# Altium PCB demo_dermis_main_testboard.PcbDoc (part 4 of 7)
Units mm, origin at the board's own origin, x right, y up, seen from the top; angles counter-clockwise.
Board outline 348.67 x 252.79 mm, 4 copper layers (Top Layer, Layer 1, Layer 2, Bottom Layer), stack 0.603 mm thick; 389 components, 231 nets, 2086 pads, 2626 vias.
Unrouted connection lines stored in the file: 34.
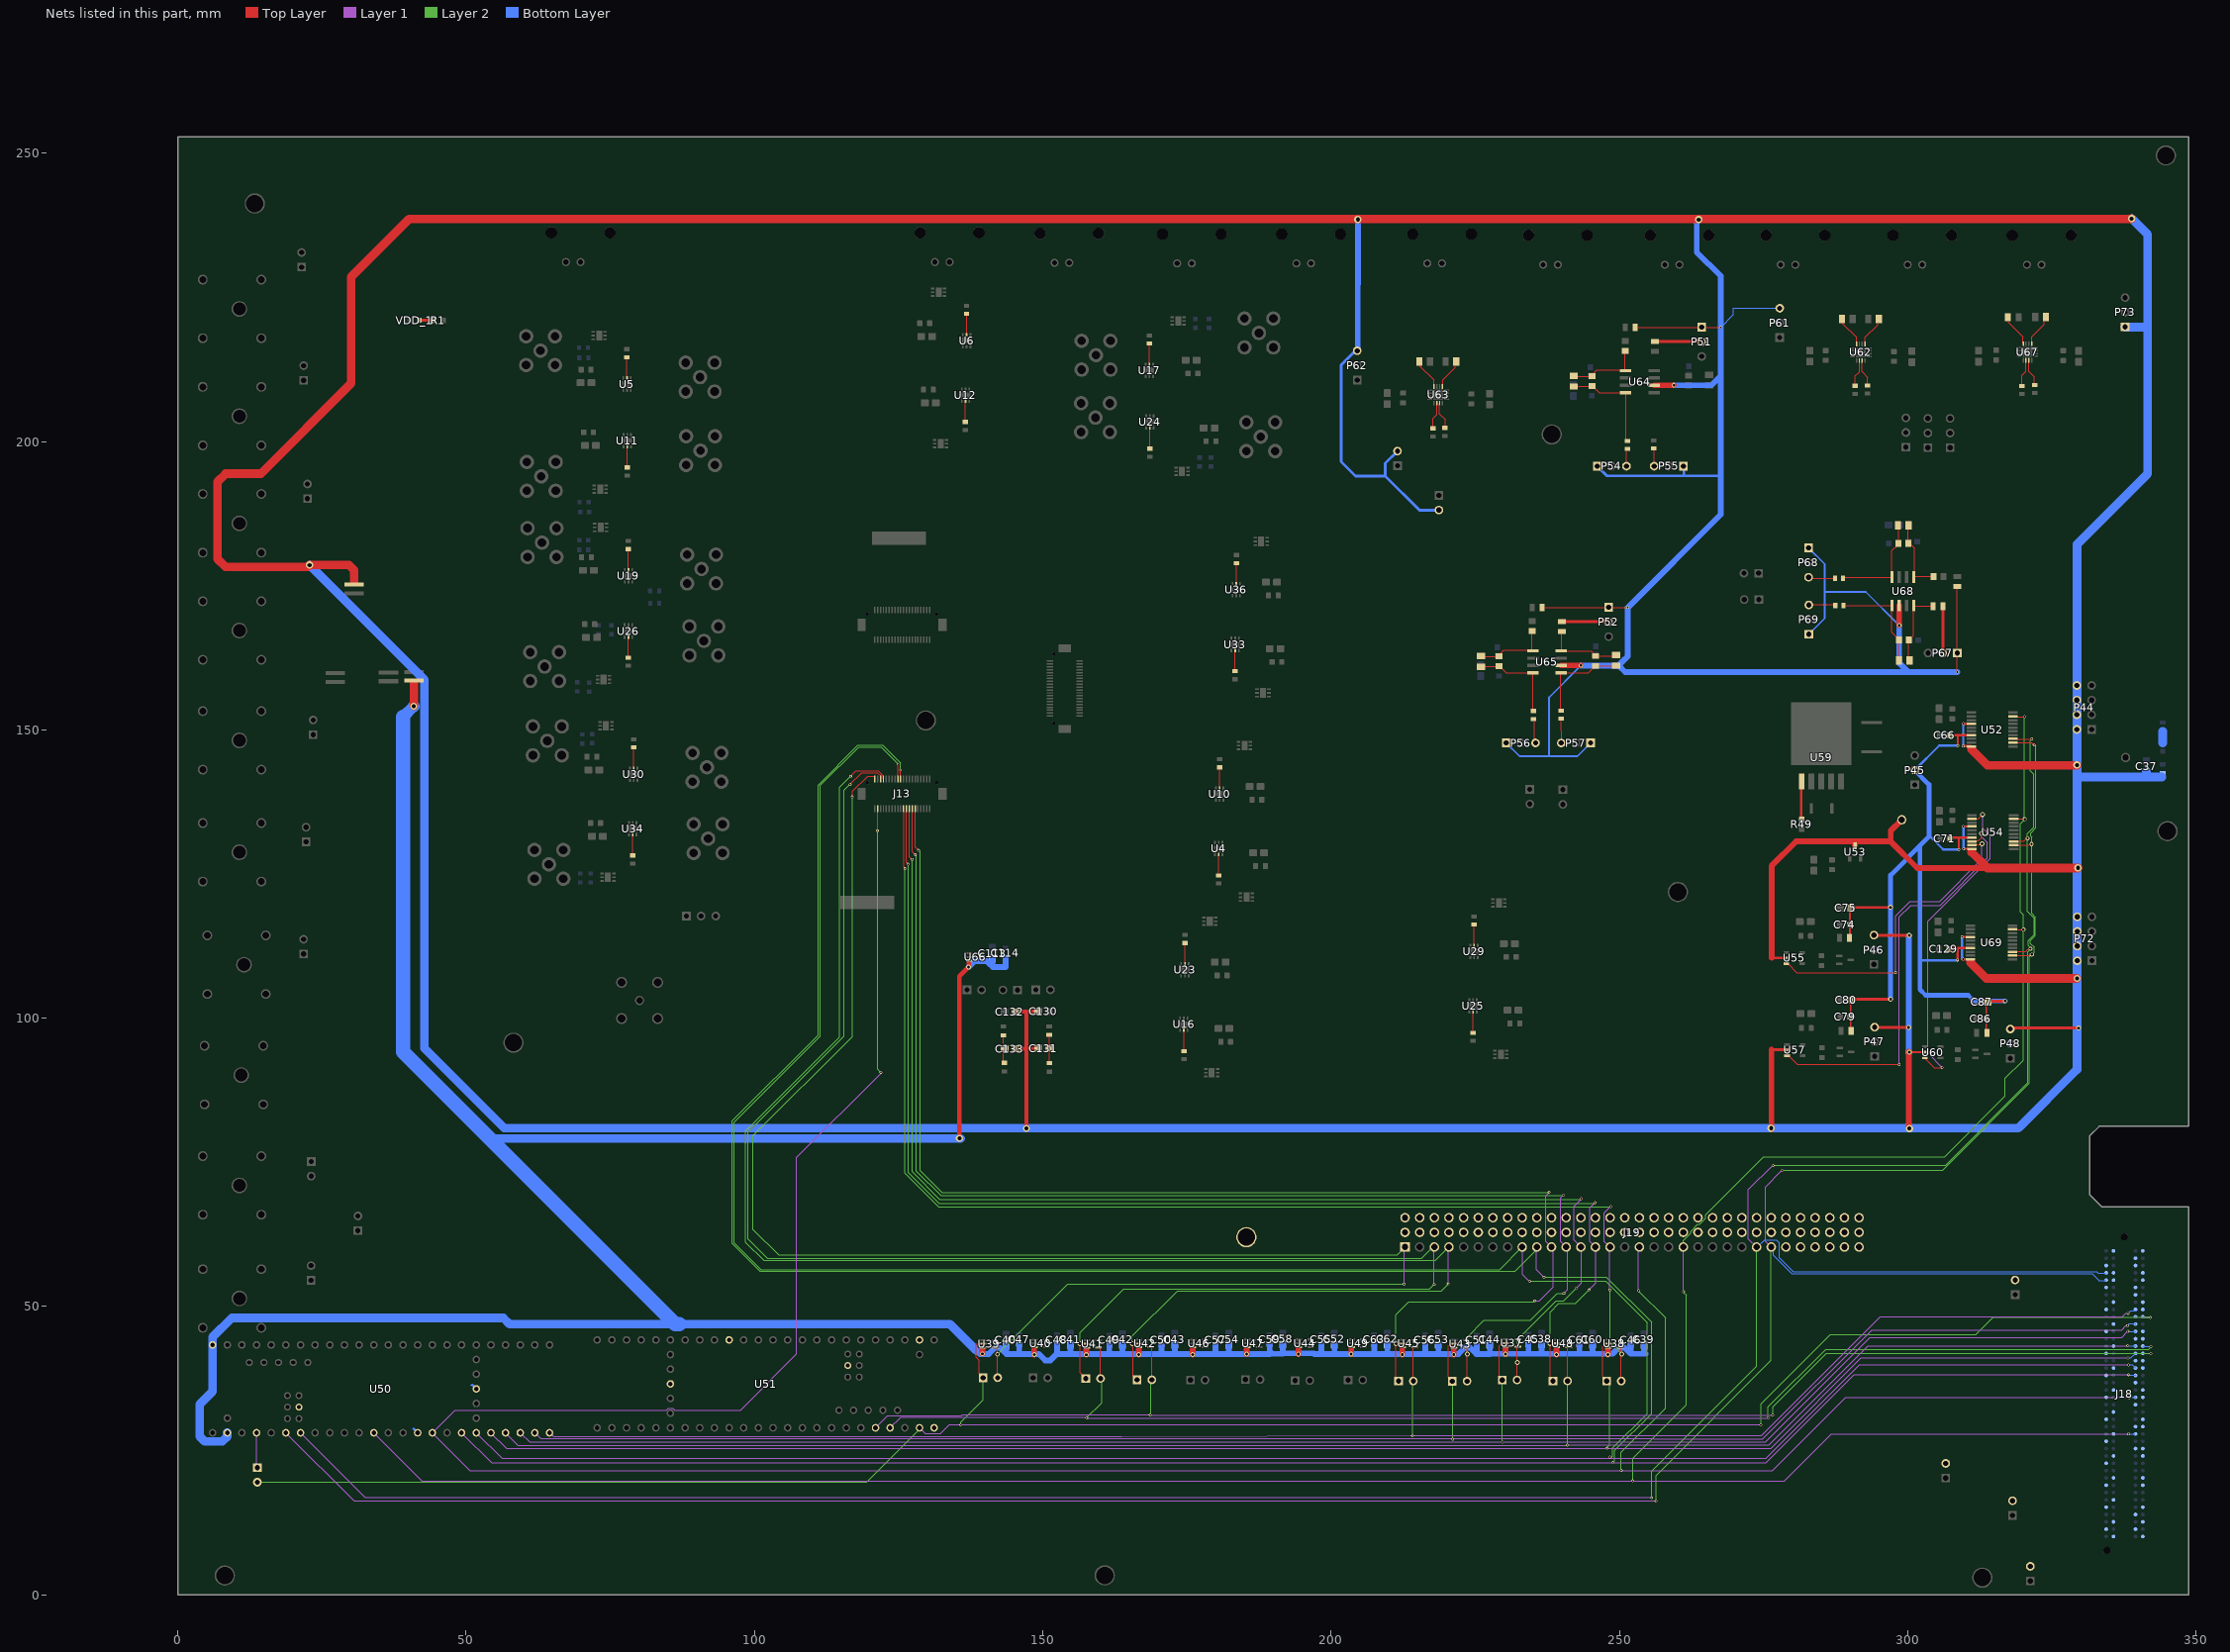
[diagram p5: the nets of this part, all layers, seen from the top]

## Via types
v1: diameter 0.4, hole 0.25, Top Layer to Bottom Layer, 1673 vias
v2: diameter 0.85, hole 0.5, Top Layer to Bottom Layer, 416 vias
v3: diameter 0.5, hole 0.3, Top Layer to Bottom Layer, 391 vias
v4: diameter 1.27, hole 0.711, Top Layer to Bottom Layer, 85 vias
v5: diameter 0.7, hole 0.4, Top Layer to Bottom Layer, 57 vias
v6: diameter 1.1, hole 0.7, Top Layer to Bottom Layer, 4 vias

## Nets (pads, with @x,y where several pads share a name; then routed paths per layer and width w, separated by ;. In a path a pad name is that pad's centre, name@x,y a point inside that pad or via, vN(x,y) a via of type N, cw(c..) or ccw(c..) an arc to the next point about the centre after c; other vN are vias at no path point) (continued)
NetC92_1: C92.1 R52.2 R62.1 U65.8@239.879,163.707 | length 12.5
  Top Layer w0.2: U65.8@239.955,163.632 U65.8@239.879,163.707 239.996,163.823 R52.2@239.996,167.024 ; U65.8@240.227,163.632 245.092,163.632 R62.1@245.495,163.229 ; R62.1@245.858,162.803 249.255,162.803 C92.1@249.427,162.974
NetC92_2: C92.2 R62.2 R68.2 U65.5@239.879,159.897 | length 16.3
  Top Layer w0.2: R68.2@239.77,153.302 U65.5@239.77,159.804 ; U65.5@240.133,159.897 244.56,159.897 245.76,161.097 R62.2@245.858,161.097 249.404,161.097 C92.2@249.427,161.12
NetC93_1: C93.1 R54.1 R59.1 U64.1@251.069,212.291 | length 13.1
  Top Layer w0.2: C93.1@242.064,211.373 242.12,211.316 R59.1@245.254,211.316 245.352,211.316 245.303,211.365 245.188,211.48 245.188,211.54 246.031,212.383 250.88,212.383 250.977,212.383 250.973,212.387 R54.1@250.973,215.706
NetC93_2: C93.2 R59.2 R65.2 U64.4@251.069,208.481 | length 17.7
  Top Layer w0.2: C93.2@242.064,209.518 242.156,209.611 R59.2@245.254,209.611 245.352,209.611 246.481,208.481 U64.4@250.772,208.481 ; U64.4@251.069,208.481 251.121,208.429 R65.2@251.121,199.983
NetC94_1: C94.1 R55.1 R61.1 U65.1@234.952,163.707 | length 13.1
  Top Layer w0.2: C94.1@225.947,162.789 226.003,162.733 R61.1@229.138,162.733 229.235,162.733 229.186,162.781 229.071,162.896 229.071,162.956 229.914,163.799 234.763,163.799 234.86,163.799 234.856,163.803 R55.1@234.856,167.122
NetC94_2: C94.2 R61.2 R66.2 U65.4@234.952,159.897 | length 15.8
  Top Layer w0.2: C94.2@225.947,160.935 226.039,161.027 R61.2@229.138,161.027 229.235,161.027 230.365,159.897 U65.4@234.656,159.897 ; U65.4@234.952,159.897 235.004,159.845 R66.2@235.004,153.344
NetC95_2: C95.2 U62.12 | length 5.4
  Top Layer w0.2: C95.2@288.564,221.265 288.564,220.582 291.083,218.063 U62.12@291.083,216.922
NetC96_2: C96.2 U63.12 | length 5.4
  Top Layer w0.2: C96.2@215.288,213.893 215.288,213.211 217.807,210.692 U63.12@217.807,209.551
NetC102_1: C102.1 U62.9 | length 5.3
  Top Layer w0.2: U62.9@292.584,216.922 292.584,217.202 292.611,217.229 292.611,218.087 294.77,220.246 294.77,221.049 C102.1@294.961,221.241
NetC107_1: C107.1 U63.9 | length 5.3
  Top Layer w0.2: U63.9@219.307,209.551 219.307,209.83 219.334,209.857 219.334,210.716 221.493,212.875 221.493,213.678 C107.1@221.684,213.869
NetC116_1: C116.1 R69.2 R74.1 U68.8@301.044,171.563 | length 12.5
  Top Layer w0.2: R74.1@300.139,165.585 300.139,162.187 C116.1@300.311,162.016 ; R74.1@300.565,165.947 300.968,166.35 U68.8@300.968,171.216 ; U68.8@300.968,171.488 U68.8@301.044,171.563 301.16,171.447 R69.2@304.36,171.447
NetC116_2: C116.2 R74.2 R77.2 U68.5@297.234,171.563 | length 18.2
  Top Layer w0.2: R77.2@288.819,171.546 288.836,171.563 U68.5@297.234,171.563 ; U68.5@297.234,171.309 297.234,166.882 298.434,165.682 R74.2@298.434,165.585 298.434,162.039 C116.2@298.457,162.016
NetC117_1: C117.1 R71.1 R73.1 U68.1@301.044,176.491 | length 13.1
  Top Layer w0.2: C117.1@300.125,185.496 300.069,185.44 R73.1@300.069,182.305 300.069,182.208 300.118,182.256 300.233,182.371 300.292,182.371 301.135,181.529 301.135,176.68 301.135,176.582 301.139,176.586 R71.1@304.459,176.586
NetC117_2: C117.2 R73.2 R76.2 U68.4@297.234,176.491 | length 17.7
  Top Layer w0.2: R76.2@288.736,176.439 297.182,176.439 U68.4@297.234,176.491 ; U68.4@297.234,176.787 297.234,181.078 298.363,182.208 R73.2@298.363,182.305 298.363,185.404 C117.2@298.271,185.496
NetC118_2: C118.2 U67.12 | length 5.4
  Top Layer w0.2: C118.2@317.46,221.324 317.46,220.641 319.979,218.122 U67.12@319.979,216.981
NetC122_1: C122.1 U67.9 | length 5.3
  Top Layer w0.2: U67.9@321.479,216.981 321.479,217.261 321.506,217.288 321.506,218.146 323.665,220.305 323.665,221.108 C122.1@323.857,221.299
NetC131_1: C131.1 R78.2 R79.1 | length 4.9
  Top Layer w0.1: C131.1@151.108,94.832 C131.1@151.067,94.791 C131.1@151.136,94.722
  Top Layer w0.2: C131.1@151.108,94.832 R78.2@151.108,97.094 ; R79.1@151.136,92.213 C131.1@151.136,94.722
NetC133_1: C133.1 R80.2 R81.1 | length 4.9
  Top Layer w0.1: C133.1@143.321,94.753 C133.1@143.366,94.707
  Top Layer w0.2: R80.2@143.163,97.041 143.163,92.424 R81.1@143.321,92.267
NetP51_2: P51.2 R51.1 | length 8.4
  Top Layer w0.5: R51.1@256.113,217.36 P51.2@264.463,217.36
NetP52_2: P52.2 R52.1 | length 8.4
  Top Layer w0.5: R52.1@239.996,168.776 P52.2@248.347,168.776
NetP54_3: P54.3 R65.1 | length 3.1
  Top Layer w0.1: R65.1@251.207,198.57 R65.1@251.359,198.722
  Top Layer w0.2: P54.3@251.207,195.729 R65.1@251.207,198.57
NetP55_3: P55.3 R67.1 | length 3.1
  Top Layer w0.1: R67.1@255.913,198.791 R67.1@256.005,198.699
  Top Layer w0.2: P55.3@256.005,195.729 R67.1@256.005,198.699
NetP56_3: P56.3 R66.1 | length 3.8
  Top Layer w0.2: P56.3@235.201,148.078 R66.1@235.201,151.871
NetP57_3: P57.3 R68.1 | length 4.1
  Top Layer w0.2: R68.1@239.832,151.817 P57.3@239.894,147.726
NetP67_2: P67.2 R69.1 | length 8.4
  Top Layer w0.5: P67.2@306.113,163.096 R69.1@306.113,171.447
NetP68_3: P68.3 R76.1 | length 4.5
  Top Layer w0.2: P68.3@282.911,176.242 287.317,176.242 R76.1@287.37,176.295
NetP69_3: P69.3 R77.1 | length 4.5
  Top Layer w0.2: P69.3@282.694,171.72 R77.1@287.228,171.72
NetR1_1: R1.1 VDD_1.K | length 2.5
  Top Layer w0.5: VDD_1.K@41.848,221.024 41.862,221.011 44.299,221.011 R1.1@44.313,220.997
NetR6_1: R6.1 U4.2 | length 3.4
  Top Layer w0.15: R6.1@180.5,124.757 U4.2@180.5,128.138
NetR7_1: R7.1 U5.2 | length 3.4
  Top Layer w0.15: U5.2@77.875,211.231 R7.1@77.875,214.612
NetR8_1: R8.1 U6.2 | length 3.4
  Top Layer w0.15: U6.2@136.766,218.748 R8.1@136.766,222.129
NetR9_1: R9.1 U10.2 | length 3.4
  Top Layer w0.15: U10.2@180.697,140.112 R9.1@180.697,143.493
NetR10_1: R10.1 U11.2 | length 3.4
  Top Layer w0.15: R10.1@77.897,195.493 U11.2@77.897,198.874
NetR11_1: R11.1 U12.2 | length 3.4
  Top Layer w0.15: R11.1@136.569,203.393 U12.2@136.569,206.774
NetR12_1: R12.1 U16.2 | length 3.4
  Top Layer w0.15: R12.1@174.462,94.298 U16.2@174.462,97.678
NetR13_1: R13.1 U17.2 | length 3.4
  Top Layer w0.15: U17.2@168.453,213.613 R13.1@168.453,216.994
NetR14_1: R14.1 U19.2 | length 3.4
  Top Layer w0.15: U19.2@78.125,177.953 R14.1@78.125,181.333
NetR15_1: R15.1 U23.2 | length 3.4
  Top Layer w0.15: U23.2@174.66,109.653 R15.1@174.66,113.034
NetR16_1: R16.1 U24.2 | length 3.4
  Top Layer w0.15: R16.1@168.546,198.757 U24.2@168.546,202.138
NetR17_1: R17.1 U25.2 | length 3.4
  Top Layer w0.15: R17.1@224.6,97.483 U25.2@224.6,100.864
NetR18_1: R18.1 U26.2 | length 3.4
  Top Layer w0.15: R18.1@78.11,162.506 U26.2@78.11,165.887
NetR19_1: R19.1 U29.2 | length 3.4
  Top Layer w0.15: U29.2@224.797,112.838 R19.1@224.797,116.219
NetR20_1: R20.1 U30.2 | length 3.4
  Top Layer w0.15: U30.2@79.052,143.574 R20.1@79.052,146.954
NetR21_1: R21.1 U33.2 | length 3.4
  Top Layer w0.15: R21.1@183.36,160.171 U33.2@183.36,163.552
NetR22_1: R22.1 U34.2 | length 3.4
  Top Layer w0.15: R22.1@78.855,128.218 U34.2@78.855,131.599
NetR23_1: R23.1 U36.2 | length 3.4
  Top Layer w0.15: U36.2@183.558,175.526 R23.1@183.558,178.907
NetR28_1: R28.1 R33.2 | length 2
  Bottom Layer w0.15: R28.1@344.172,149.772 R28.1@344.196,149.747
  Bottom Layer w1.5: R33.2@344.196,147.759 R28.1@344.196,149.747
NetR49_1: R49.1 U59.1 | length 7.5
  Top Layer w0.5: R49.1@281.505,134.339 U59.1@281.505,141.834
NetR53_1: R53.1 U62.2 | length 4.7
  Top Layer w0.2: R53.1@290.891,209.661 290.891,211.364 291.593,212.066 291.593,214.018 U62.2@291.583,214.027
NetR56_1: R56.1 U62.3 | length 4.9
  Top Layer w0.2: U62.3@292.084,214.027 292.084,212.113 293.041,211.156 293.041,209.887 293.091,209.837 R56.1@293.266,209.661
NetR57_1: R57.1 U63.2 | length 4.7
  Top Layer w0.2: R57.1@217.614,202.29 217.614,203.993 218.316,204.694 218.316,206.646 U63.2@218.307,206.655
NetR58_1: R58.1 U63.3 | length 4.9
  Top Layer w0.2: U63.3@218.807,206.655 218.807,204.742 219.764,203.785 219.764,202.516 219.814,202.466 R58.1@219.99,202.29
NetR70_1: R70.1 U67.2 | length 4.7
  Top Layer w0.2: R70.1@319.786,209.638 319.787,209.72 319.787,211.423 320.488,212.124 320.488,214.077 U67.2@320.479,214.086
NetR72_1: R72.1 U67.3 | length 4.9
  Top Layer w0.2: U67.3@320.979,214.086 320.979,212.172 321.936,211.216 321.936,209.946 322.067,209.815 R72.1@322.162,209.72
PCB_AGND: C37.2 C130.2 C131.2 C132.2 C133.2 J20.1 P44.2 P44.4 P44.6 P44.8 P46.3 P47.3 P48.3 P51.1 P52.1 P54.1 P55.1 P56.1 P57.1 P60.2 P61.3 P62.3 P63.2 P67.1 P68.1 P69.1 P72.2 P72.4 P72.6 P72.8 P73.1 R4.2 R34.1 R63.2 R64.2 R75.2 U52.4 U52.10 U53.3 U54.4 U54.10 U55.2 U57.2 U60.2 U64.6@255.996,209.751 U65.6@239.879,161.167 U68.6@298.504,171.563 U69.4 U69.10 | length 1610
  Top Layer w0.1: C133.2@145.266,94.707 C133.2@145.335,94.638
  Top Layer w0.2: R64.2@236.602,171.216 236.619,171.233 v3@251.397,171.233 ; R63.2@252.719,219.8 252.736,219.816 v3@267.514,219.816 ; P46.3@294.132,114.407 P46.3@294.156,114.383 ; P47.3@294.233,98.455 P47.3@294.257,98.432 ; R75.2@308.552,174.84 308.569,174.823 v3@308.569,160.046 ; v3(309.661,129.39) v3@309.681,129.371 ; U69.4@310.875,114.101 U69.4@310.879,114.097 ; U54.4@311.091,133.254 U54.4@311.094,133.251 ; P48.3@317.763,98.122 P48.3@317.787,98.098
  Top Layer w0.3: U55.2@279.101,110.462 U55.2@279.205,110.358 ; U57.2@279.202,94.511 U57.2@279.306,94.407 ; v2(300.245,94.131) 300.276,94.1 302.91,94.1 U60.2@302.941,94.07
  Top Layer w0.4: v3@309.38,114.104 v3(309.384,114.101) U69.4@310.875,114.101 ; v3@309.465,110.217 310.784,110.217 U69.10@310.879,110.197 ; v3@309.596,133.258 v3(309.599,133.254) U54.4@311.091,133.254 ; v3(309.601,151.085) 309.631,151.055 U52.4@311.241,151.055 ; v3@309.681,129.371 311,129.371 U54.10@311.094,129.351 ; v3@309.831,147.171 310.989,147.171 U52.10@310.989,147.136
  Top Layer w0.5: 276.364,94.511 U57.2@279.202,94.511 ; 276.367,110.462 U55.2@279.101,110.462 ; P46.3@294.156,114.383 294.178,114.361 v2(300.216,114.361) ; P47.3@294.257,98.432 294.279,98.41 v2@300.007,98.41 ; P48.3@317.763,98.287 v2@329.455,98.287 ; P48.3@317.787,98.098 P48.3@317.809,98.076
  Top Layer w0.7: C132.2@145.237,101.087 145.302,101.152 147.131,101.152 ; C133.2@145.266,94.707 145.286,94.728 147.131,94.728 ; v4@147.131,80.612 147.131,80.899 147.131,94.728 ; C130.2@149.138,101.171 149.119,101.152 147.131,101.152 ; C131.2@149.167,94.791 149.103,94.728 147.131,94.728 ; 147.131,94.728 147.131,101.152
  Top Layer w1: U65.6@239.879,161.167 v5@243.307,161.167 ; U64.6@255.996,209.751 v5@259.424,209.751 ; v4@276.364,80.671 276.364,94.511 ; 276.367,110.462 276.367,126.402 280.608,130.644 290.838,130.644 ; U53.3@290.838,129.914 290.865,129.941 290.865,130.644 297.045,130.644 ; v5@298.504,168.136 U68.6@298.504,171.563 ; J20.1@298.945,134.405 297.045,132.505 297.045,130.644 ; v4@300.162,80.895 v2@300.162,94.238 ; 313.792,126.05 301.639,126.05 297.045,130.644
  Top Layer w1.5: 30.552,175.676 30.552,177.703 29.673,178.582 v4(22.852,178.582) 22.509,178.239 8.284,178.239 6.883,179.639 6.883,193.014 8.284,194.415 14.397,194.415 30.064,210.082 30.064,228.546 40.099,238.581 338.74,238.581 v4(338.813,238.654) ; 310.841,109.632 313.576,106.896 v4@329.256,106.896 ; 311.056,128.785 313.792,126.05 329.472,126.05 v4(329.506,126.084) ; 311.059,146.601 313.809,143.851 v4@329.327,143.851
  Bottom Layer w0.1: P55.1@261.085,195.729 P55.1@261.159,195.655 ; 267.556,194.037 267.647,194.037 ; 267.556,194.836 267.788,194.837
  Bottom Layer w0.15: R34.1@343.778,142.226 344.059,142.506 R34.1@344.199,142.506
  Bottom Layer w0.2: v3(267.556,219.804) 269.749,221.997 269.749,223.105 P61.3@277.78,223.105 ; v3(309.384,114.101) v3@309.415,114.07 ; v3@309.415,110.268 309.587,110.268 v3(309.618,110.237) ; v3(309.599,133.254) v3@309.63,133.223 ; v3@309.63,129.421 v3(309.661,129.39)
  Bottom Layer w0.3: P56.1@230.36,147.731 232.661,145.43 237.785,145.43 ; v5(243.308,161.158) 237.785,155.635 237.785,145.43 ; P57.1@244.974,147.726 242.678,145.43 237.785,145.43 ; P68.1@282.778,181.544 285.572,178.75 285.572,173.926 ; P69.1@282.83,166.582 285.572,169.324 285.572,173.926 ; v5(298.495,168.134) 292.704,173.926 285.572,173.926
  Bottom Layer w0.4: v3@309.415,110.268 v3@309.415,114.07 ; v3@309.61,147.214 v3@309.61,151.016 ; v3@309.63,129.421 v3@309.63,133.223
  Bottom Layer w0.5: P62.3@204.352,215.885 201.745,213.279 201.745,196.498 204.227,194.016 209.363,194.016 ; P63.2@211.499,198.344 209.363,196.208 209.363,194.016 ; P60.2@218.681,188.108 215.27,188.108 209.363,194.016 ; P54.1@246.127,195.729 247.819,194.037 261.159,194.037 ; P55.1@261.159,195.655 261.159,194.037 ; 267.556,194.037 261.159,194.037 ; v2(300.127,98.398) 300.138,98.408 v2@300.162,98.408 ; v2@300.162,114.307 v2(300.216,114.361) ; v2(329.574,98.275) 329.585,98.286 v2@329.662,98.286
  Bottom Layer w1: P62.3@204.609,215.72 204.609,215.734 v4(204.635,238.507) ; v5(243.308,161.158) 249.817,161.158 ; v5(259.425,209.742) 265.933,209.742 266.706,210.515 267.556,211.365 ; v4@263.394,238.141 263.394,232.797 265.408,230.783 265.502,230.783 267.556,228.729 v3(267.556,219.804) 267.556,211.365 ; v5(298.495,168.134) 298.495,161.626 299.267,160.853 300.118,160.003 ; v2@300.162,93.857 300.162,98.408 v2@300.162,114.307 ; v3(308.557,160.003) 300.118,160.003 ; 249.817,161.158 250.972,160.003 300.118,160.003 ; 249.817,161.158 250.589,161.931 251.44,162.781 v3(251.44,171.22) 267.556,187.337 267.556,194.037 267.556,194.836 267.556,211.365
  Bottom Layer w1.5: v4(22.852,178.582) 42.759,158.675 42.759,94.796 56.623,80.932 68.745,80.932 v4(276.289,80.932) 319.141,80.932 ; 319.248,81.028 329.327,91.107 329.327,98.516 329.327,106.902 329.327,109.966 329.327,112.506 329.327,114.315 329.327,115.046 329.327,117.586 329.327,126.084 v4(329.327,143.906) 329.327,182.137 341.572,194.382 341.572,219.849 ; 329.705,141.808 341.31,141.808 341.31,142.646 C37.2@341.36,142.696 ; P73.1@337.679,219.874 337.704,219.849 341.572,219.849 ; v4(338.813,238.654) 338.841,238.654 341.572,235.923 341.572,219.849 ; 341.36,141.808 344.008,141.808
  other v3: 309.62,147.188
  other v4: 300.26,80.873 147.143,80.899 329.343,106.902 263.736,238.483
PCB_DGND: C38.2 C39.2 C40.2 C41.2 C42.2 C43.2 C44.2 C45.2 C46.2 C47.2 C48.2 C49.2 C50.2 C51.2 C52.2 C53.2 C54.2 C55.2 C56.2 C57.2 C58.2 C59.2 C60.2 C61.2 C62.2 C63.2 C113.2 C114.2 J18.C01 J18.C04 J18.C05 J18.C08 J18.C09 J18.C12 J18.C13 J18.C16 J18.C17 J18.C20 J18.C21 J18.C24 J18.C25 J18.C28 J18.C29 J18.C32 J18.C33 J18.C36 J18.C38 J18.C40 J18.D02 J18.D03 J18.D06 J18.D07 J18.D10 J18.D13 J18.D16 J18.D19 J18.D22 J18.D25 J18.D28 J18.D37 J18.D39 J18.G01 J18.G04 J18.G05 J18.G08 J18.G11 J18.G14 J18.G17 J18.G20 J18.G23 J18.G26 J18.G29 J18.G32 J18.G35 J18.G38 J18.G40 J18.H03 J18.H06 J18.H09 J18.H12 J18.H15 J18.H18 J18.H21 J18.H24 J18.H27 J18.H30 J18.H33 J18.H36 J18.H39 J19.2 J19.3 J19.5 J19.6 J19.8 J19.9 J19.11 J19.12 J19.14 J19.15 J19.17 J19.18 J19.20 J19.21 J19.23 J19.24 J19.26 J19.27 J19.29 J19.30 J19.32 J19.33 J19.35 J19.36 J19.38 J19.39 J19.41 J19.42 J19.44 J19.45 J19.47 J19.48 J19.50 J19.51 J19.53 J19.54 J19.56 J19.57 J19.59 J19.60 J19.62 J19.63 J19.65 J19.66 J19.68 J19.69 J19.71 J19.72 J19.74 J19.75 J19.77 J19.78 J19.79 J19.80 J19.81 J19.82 J19.83 J19.84 J19.85 J19.86 J19.87 J19.88 J19.89 J19.90 J19.91 J19.92 J19.93 J19.94 J19.95 J19.96 P40.2 P41.2 P42.2 P43.2 pad.3@185.299,62.022 R5.2 U37.3@230.271,43.012 U38.3@248.047,42.922 U39.3@139.59,42.881 U40.3@148.545,42.948 U41.3@157.599,42.894 U42.3@166.658,42.943 U43.3@221.307,42.903 U44.3@194.362,42.983 U45.3@212.378,42.932 U46.3@176.028,42.943 U47.3@185.4,42.988 U48.3@239.118,42.951 U49.3@203.531,42.993 U50.GND1 U50.GND2 U50.GND3 U50.GND4 U50.GND5 U51.GND1 U51.GND2 U51.GND3 U51.GND4 U51.GND5 U66.3@137.236,109.967 | length 588.7
  Top Layer w0.8: v4@135.493,79.26 135.493,107.246 v2(137.131,108.884) 137.131,109.6
  Top Layer w1: v2(139.485,41.798) 139.485,42.514 ; v2(148.494,41.687) 148.494,42.547 ; v2(157.548,41.633) 157.548,42.493 ; v2(166.607,41.683) 166.607,42.542 ; v2(175.977,41.683) 175.977,42.542 ; v2(185.349,41.728) 185.349,42.587 ; v2(194.311,41.722) 194.311,42.582 ; v2(203.48,41.733) 203.48,42.592 ; v2(212.327,41.672) 212.327,42.531 ; v2(221.256,41.642) 221.256,42.502 ; v2(230.22,41.751) 230.22,42.611 ; v2(239.067,41.69) 239.067,42.55 ; v2(247.996,41.661) 247.996,42.52
  Top Layer w1.5: v4@40.936,154.129 40.936,158.025
  Layer 1 w0.15: J19.2@212.273,62.863 J19.2@212.804,62.863 ; J19.5@215.344,62.645 J19.5@215.344,62.863 ; J19.8@217.884,62.81 J19.8@217.884,62.863
  Layer 1 w0.2: J19.65@266.144,62.863 J19.65@266.306,62.7
  Layer 2 w0.15: J19.36@240.744,65.403 J19.36@241.044,65.403
  Bottom Layer w0.1: 50.726,36.42 51.059,36.42
  Bottom Layer w0.4: 40.89,28.798 U50.GND2@41.582,28.107 ; 51.059,36.42 U50.GND4@51.75,35.729
  Bottom Layer w1: v2(137.131,108.884) 138.17,109.923 140.243,109.923 140.902,109.264 ; 138.43,42.418 139.065,41.784 140.613,41.784 141.666,42.837 142.597,42.837 143.257,42.178 ; C113.2@141.262,110.387 141.262,108.936 141.328,108.87 143.551,108.87 ; 143.551,108.912 C114.2@143.551,110.493 ; C40.2@143.616,43.301 143.616,41.85 143.682,41.784 149.279,41.784 150.394,40.669 151.325,40.669 152.44,41.784 152.473,41.784 ; 145.905,41.826 C47.2@145.905,43.407 ; C48.2@152.458,43.369 152.473,43.345 152.473,41.784 ; 154.763,41.871 C41.2@154.763,43.452 ; C49.2@161.512,43.315 161.527,43.291 161.527,41.784 ; 163.816,41.817 C42.2@163.816,43.398 ; C50.2@170.571,43.365 170.587,43.341 170.587,41.784 ; 172.876,41.866 C43.2@172.876,43.447 ; C57.2@179.94,43.365 179.956,43.341 179.956,41.784 ; 182.245,41.866 C54.2@182.245,43.447 ; C59.2@189.313,43.41 189.329,43.386 189.329,42.227 ; 191.618,42.227 C58.2@191.618,43.492 ; C55.2@198.275,43.404 198.29,43.38 198.29,41.8 ; 200.579,41.906 C52.2@200.579,43.487 ; C63.2@207.443,43.415 207.459,43.391 207.459,41.81 ; 209.748,41.916 C62.2@209.748,43.497 ; C56.2@216.291,43.354 216.307,43.33 216.307,41.784 ; 218.596,41.855 C53.2@218.596,43.436 ; C51.2@225.22,43.325 225.235,43.3 225.235,41.784 ; C44.2@227.524,43.407 227.524,41.803 ; C45.2@234.184,43.434 234.199,43.41 234.199,41.829 ; 236.488,41.935 C38.2@236.488,43.516 ; C61.2@243.031,43.373 243.047,43.349 243.047,41.803 ; 245.336,41.874 C60.2@245.336,43.455 ; C46.2@251.96,43.343 251.976,43.319 251.976,41.803 ; 254.265,41.844 C39.2@254.265,43.425 ; 254.482,41.803 251.976,41.803 ; 152.473,41.784 161.527,41.784 ; 161.527,41.784 170.587,41.784 ; 170.587,41.784 179.956,41.784 ; 179.956,41.784 189.329,41.784 189.329,42.227 ; 189.329,42.227 189.745,41.811 191.618,41.811 191.618,41.883 196.98,41.883 197.079,41.784 216.307,41.784 ; 216.307,41.784 222.061,41.784 223.154,42.877 224.086,42.877 225.179,41.784 225.235,41.784 ; 225.235,41.784 227.524,41.784 227.524,41.803 ; 227.524,41.803 230.22,41.803 239.067,41.803 243.047,41.803 ; 243.047,41.803 248.801,41.803 249.894,42.896 250.826,42.896 251.919,41.803 251.976,41.803
  Bottom Layer w1.5: U50.GND3@8.57,28.109 8.57,27.483 7.692,26.605 4.656,26.605 3.778,27.483 3.778,33.036 6.038,35.297 6.038,44.692 9.365,48.019 56.44,48.019 57.499,46.96 86.273,46.96 ; 54.626,79.124 135.548,79.124 v4@135.716,79.124 ; 86.939,46.96 133.889,46.96 138.43,42.418
  Bottom Layer w2: 39.085,152.279 v4(40.909,154.103)
  Bottom Layer w2.5: 39.085,152.279 39.085,94.148 86.273,46.96 86.939,46.96
  other v4: 135.548,79.168
RATIOMODE0: J13.23 J18.D17 J19.25 U50.38 | length 598.4
  Top Layer w0.15: J13.23@124.845,141.48 124.849,141.485 v1(124.848,144.049) ; v1(124.848,144.049) v1(124.848,144.049)
  Layer 1 w0.15: U50.38@51.75,28.109 56.205,23.654 58.152,23.654 248.501,23.654 274.509,23.654 275.392,23.654 291.626,39.887 v3(338.26,39.887) ; J19.25@233.224,60.474 233.224,55.546 v3(234.405,54.365)
  Layer 2 w0.15: v1(124.848,144.049) 124.848,144.116 121.935,147.029 118.094,147.029 111.438,140.373 111.438,96.934 96.452,81.948 96.452,61.025 101.065,56.412 229.214,56.412 J19.25@233.124,60.323 ; v3@234.405,54.387 247.579,54.387 254.798,47.168 254.798,31.453 248.835,25.491 248.835,24.032 248.501,23.698
  Bottom Layer w0.15: v3(338.26,39.887) 338.924,39.887 J18.D17@339.476,39.336
  other v3: 248.322,23.887
RATIOMODE1: J13.21 J18.D18 J19.28 U50.39 | length 603.3
  Top Layer w0.15: v1(125.324,143.026) 125.335,143.015 125.335,141.491 J13.21@125.345,141.48
  Layer 1 w0.15: U50.39@49.21,28.109 54.397,22.922 58.081,22.922 248.846,22.922 274.854,22.922 275.448,22.922 290.712,38.185 v3(338.3,38.185) ; J19.28@235.591,60.323 235.591,56.376 236.868,55.099 v3(236.9,55.099)
  Layer 2 w0.15: v1(125.324,143.026) 125.324,144.245 122.24,147.329 117.969,147.329 111.041,140.401 111.041,97.089 96.151,82.199 96.151,60.901 100.94,56.112 231.901,56.112 J19.28@235.511,59.721 ; v3@236.833,55.165 236.873,55.124 247.7,55.124 255.541,47.283 255.541,31.391 249.18,25.03 249.18,23.3 v3@248.846,22.966
  Bottom Layer w0.15: v3(338.3,38.185) 338.36,38.126 339.416,38.126 J18.D18@339.476,38.066
  other v3: 248.857,22.936
REQOFF: J13.33 J19.10 P33.1 U42.2@166.658,43.593 | length 293.6
  Top Layer w0.15: v3(116.652,141.95) 117.613,142.91 121.434,142.91 122.345,141.999 J13.33@122.345,141.48 ; P33.1@166.35,37.292 165.675,37.967 165.675,43.235 165.51,43.4 v2(165.51,43.589) 165.512,43.592 166.656,43.592 U42.2@166.658,43.593
  Layer 1 w0.15: v3(220.292,53.91) J19.10@220.292,60.357
  Layer 2 w0.15: v3(116.652,141.95) 114.79,140.088 114.79,96.737 98.486,80.433 98.486,61.112 101.585,58.013 218.114,58.013 J19.10@220.424,60.323 ; v2(165.51,43.589) 165.51,44.891 173.356,52.737 175.716,52.737 219.119,52.737 v3(220.292,53.91)
REQOFF_EXT: J18.C15 P33.2 U42.4@168.741,42.943 U51.3 | length 240.7
  Top Layer w0.15: U42.4@168.741,42.943 168.787,42.944 168.89,42.841 P33.2@168.89,37.292
  Layer 1 w0.15: U51.3@120.988,28.974 123.081,31.067 135.875,31.067 136.06,31.253 168.576,31.253 v3(168.639,31.19) ; v3@168.639,31.174 271.705,31.174 ; 271.759,31.174 271.787,31.201 276.572,31.201 v3(276.583,31.19)
  Layer 2 w0.15: v3(168.639,31.19) 168.706,31.257 168.706,37.108 P33.2@168.89,37.292 ; v3(276.583,31.19) 276.583,32.602 285.845,41.863 v3(342.127,41.863)
  Bottom Layer w0.15: J18.C15@340.746,41.876 340.752,41.869 342.12,41.869 v3(342.127,41.863)
REQON: J13.35 J19.7 P32.1 U41.2@157.599,43.544 | length 294.9
  Top Layer w0.15: v3(116.574,140.536) 118.619,142.581 121.262,142.581 121.845,141.999 J13.35@121.845,141.48 ; P32.1@157.468,37.524 156.45,38.542 v2(156.45,43.54) 156.452,43.542 157.597,43.542 U41.2@157.599,43.544
  Layer 1 w0.15: v3(217.863,53.822) J19.7@217.863,60.323
  Layer 2 w0.15: v3(116.574,140.536) 115.547,139.51 115.547,96.876 98.884,80.214 98.884,61.695 102.249,58.33 215.645,58.33 J19.7@217.638,60.323 ; v2(156.45,43.54) 156.45,45.491 163.996,53.037 170.061,53.037 217.079,53.037 v3(217.863,53.822)
REQON_EXT: J18.C14 P32.2 U41.4@159.681,42.894 U51.2 | length 240.6
  Top Layer w0.15: P32.2@160.008,37.524 160.008,42.814 U41.4@160.088,42.894
  Layer 1 w0.15: U51.2@123.528,28.974 125.371,30.817 146.31,30.817 157.597,30.818 157.749,30.665 275.776,30.665 v3(275.787,30.676) ; v3@157.567,30.728 v3(157.597,30.699)
  Layer 2 w0.15: v3(157.597,30.699) 157.603,30.699 160.201,33.297 160.201,37.332 P32.2@160.008,37.524 ; v3(275.787,30.676) 275.787,32.624 285.766,42.602 341.711,42.602 v3(342.132,43.024)
  Bottom Layer w0.15: J18.C14@340.746,43.146 340.806,43.085 342.071,43.085 v3(342.132,43.024)
RESETb: J18.D26 J19.58 U50.15 U52.19 U54.19 U69.19 | length 496.9
  Top Layer w0.15: U52.19@318.253,152.336 318.314,152.336 318.364,152.286 v3(320.225,152.286)
  Top Layer w0.2: U54.19@318.359,134.551 318.378,134.532 320.251,134.532 v5(320.269,134.513) ; U69.19@318.643,115.397 U69.19@318.662,115.378 ; U69.19@318.811,115.375 v5@320.054,115.375
  Layer 1 w0.15: U50.15@33.97,28.109 42.331,19.748 278.568,19.748 286.716,27.897 v3(338.278,27.897) ; v3(261.09,52.559) J19.58@261.09,59.773
  Layer 2 w0.15: v3(252.289,19.761) 252.289,23.718 261.564,32.993 261.564,51.987 261.09,52.461 v3(261.09,52.559) ; J19.58@261.064,60.323 261.064,61.448 262.322,62.706 262.322,62.995 263.589,64.262 263.877,64.262 264.894,65.278 264.894,65.92 274.939,75.965 306.37,75.965 316.897,86.492 316.897,89.596 320.013,92.713 320.022,115.36 320.023,117.935 319.499,118.458 319.499,133.743 v5(320.269,134.513) 320.225,134.557 v3(320.225,152.286)
  Bottom Layer w0.15: v3@338.317,27.858 J18.D26@339.33,27.858
  other v5: 320.054,115.36
RST: J13.39 J19.1 P31.2 U39.4@141.672,42.881 | length 293.8
  Top Layer w0.15: v3(116.954,138.364) 117,138.41 117,139.378 119.603,141.981 120.855,141.981 120.855,141.49 J13.39@120.845,141.48 ; U39.4@141.672,42.881 U39.4@142.062,42.881 ; v2(142.131,41.712) U39.4@142.131,42.812 ; P31.2@142.165,37.658 142.165,42.778 U39.4@142.131,42.812 ; U39.4@142.062,42.881 U39.4@142.131,42.812 ; U39.4@142.062,42.881 142.079,42.881 U39.4@142.131,42.934 ; U39.4@142.131,42.812 U39.4@142.131,42.934 ; U39.4@142.131,42.934 142.182,42.984 142.182,43.093 142.131,43.043 U39.4@142.131,42.934
  Layer 1 w0.15: v3@212.691,53.733 J19.1@212.691,60.638
  Layer 2 w0.15: 104.154,58.972 99.77,63.357 99.77,79.617 116.954,96.802 v3(116.954,138.364) ; 104.184,58.972 211.453,58.972 J19.1@212.804,60.323 ; v2(142.131,41.712) 154.321,53.902 v3(212.65,53.902)
RST_EXT: J18.C10 P31.1 P49.2 U39.2@139.59,43.531 U51.0 | length 361.9
  Top Layer w0.15: U39.2@139.59,43.531 139.579,43.541 138.459,43.541 138.459,41.183 138.95,40.692 138.95,38.333 P31.1@139.625,37.658 ; v3@341.972,48.16 v3(342.049,48.083)
  Layer 1 w0.15: U51.0@128.608,28.974 129.618,27.964 132.255,27.964 133.781,29.49 v3(135.764,29.49) ; v3@135.759,29.489 v3(135.764,29.49) ; v3@274.525,29.49 150.764,29.49 v3(135.764,29.49)
  Layer 2 w0.15: v3(135.764,29.49) 135.764,29.99 139.625,33.85 P31.1@139.625,37.658 ; v3(274.525,29.487) 274.525,33.149 286.536,45.16 311.757,45.16 314.757,48.16 v3@341.972,48.16
  Layer 2 w0.2: P49.2@13.786,19.536 119.466,19.536 128.608,28.677 U51.0@128.608,28.974
  Bottom Layer w0.15: J18.C10@340.746,48.226 340.821,48.15 341.982,48.15 v3(342.049,48.083)
RST_EXT_PRE: P49.1 U50.23 | length 6.1
  Layer 1 w0.1: P49.1@13.65,22.211 P49.1@13.786,22.076
  Layer 1 w0.2: P49.1@13.65,22.211 U50.23@13.65,28.109
SCLK: J18.H04 J19.73 U50.20 U52.13 U54.13 U69.13 | length 492.5
  Top Layer w0.2: U54.13@317.894,130.704 320.137,130.704 320.629,131.196 v5(320.749,131.196) ; U69.13@318.178,111.551 320.422,111.551 320.89,112.019 v5@321.255,112.019 ; U52.13@318.507,148.453 318.573,148.387 318.61,148.424 v3(321.491,148.424)
  Layer 1 w0.15: U50.20@21.27,28.109 32.444,16.935 v3@255.572,16.935 ; J19.73@273.764,60.323 272.336,61.751 272.336,70.283 v3@276.591,74.538
  Layer 2 w0.15: v3@255.572,16.904 255.572,21.437 273.764,39.629 J19.73@273.764,60.323 ; v3@276.71,74.508 306.527,74.508 320.826,88.807 320.826,111.461 321.41,112.045 320.886,112.569 320.886,113.479 321.882,114.475 321.882,117.353 320.749,118.486 v5(320.749,131.196) 320.749,131.991 321.872,133.113 321.872,142.291 321.25,142.912 321.25,148.183 v3(321.491,148.424)
  Bottom Layer w0.15: J19.73@273.764,60.323 273.899,60.323 275.115,61.538 277.17,61.538 277.714,60.994 277.714,58.421 280.106,56.029 332.754,56.029 333.001,55.782 ; 333.018,55.765 J18.H04@334.304,55.765
  other v3: 255.583,16.831 276.617,74.447
  other v5: 321.255,112.045
SDI: J18.H05 J19.76 U50.21 U52.12 U54.12 U69.12 | length 491.3
  Top Layer w0.2: U52.12@318.253,147.786 318.253,147.886 318.39,147.749 321.399,147.749 321.724,147.424 v3(321.9,147.424) ; U54.12@318.359,130.001 318.19,130.001 318.193,129.997 321.008,129.997 321.203,130.192 v5(321.457,130.192) ; U69.12@318.643,110.847 318.474,110.847 318.478,110.843 321.292,110.843 v5(321.487,111.038) v5@321.741,111.038
  Layer 1 w0.15: U50.21@18.73,28.109 30.562,16.277 v3(256.343,16.277) ; J19.76@276.304,60.323 275.304,61.323 275.304,70.722 v3(278.18,73.598)
  Layer 2 w0.15: v3@256.322,16.346 256.322,20.709 276.304,40.691 J19.76@276.304,60.323 ; v3@278.273,73.658 306.031,73.658 321.076,88.703 321.076,110.627 v5(321.487,111.038) 321.88,111.431 321.88,112.304 321.222,112.962 ; 321.22,112.964 321.222,112.962 ; v3(321.9,147.424) 322.171,147.152 322.171,132.989 321.293,132.11 321.293,131.572 321.457,131.408 v5(321.457,130.192) 321.457,118.143 322.132,117.468 322.132,114.357 321.222,113.447 321.222,112.962
  Bottom Layer w0.15: J19.76@276.304,60.323 276.663,59.964 276.663,58.881 279.882,55.662 331.97,55.662 333.071,54.561 ; 333.088,54.544 J18.H05@334.374,54.544
SER_CLK: J13.14 J19.34 P30.2 U43.4@223.39,42.903 | length 225
  Top Layer w0.15: J13.14@127.345,135.881 J13.14@127.345,136.33 ; U43.4@223.39,42.903 223.588,42.903 223.62,42.871 v2(223.62,41.752) ; P30.2@223.555,37.058 U43.4@223.555,42.871 ; U43.4@223.62,42.903 U43.4@223.796,42.903
  Top Layer w0.2: J13.14@127.35,135.923 127.35,128.854 v3(127.882,128.322)
  Layer 1 w0.1: v3(240.244,69.317) 239.769,68.841 239.769,61.298 J19.34@240.744,60.323
  Layer 1 w0.15: v3(240.356,52.277) 241.03,52.952 J19.34@241.03,60.076
  Layer 2 w0.15: v3@127.919,128.479 127.98,128.416 128.086,128.307 128.086,73.469 132.322,69.232 v3@240.246,69.232 ; v2@223.616,41.858 223.616,44.746 226.479,47.609 234.556,47.609 237.419,50.472 239.224,52.277 v3(240.356,52.277)
SER_CLK_EXT: J18.D11 P30.1 U43.2@221.307,43.553 U50.34 | length 304.1
  Top Layer w0.15: P30.1@221.015,37.058 220.34,37.733 220.34,43.143 220.344,43.143 220.752,43.551 221.305,43.551 U43.2@221.307,43.553
  Layer 1 w0.15: U50.34@61.91,28.109 62.917,27.102 255.82,27.102 255.883,27.039 273.042,27.039 274.83,27.039 293.749,45.958 337.076,45.958 337.805,46.687 v3(338.095,46.687)
  Layer 2 w0.15: v3(221.08,27.012) 221.08,37.063 221.012,37.131 P30.1@221.12,37.238
  Bottom Layer w0.15: v3(338.095,46.687) 338.404,46.997 339.434,46.997 J18.D11@339.451,46.98 ; J18.D11@339.434,46.914 J18.D11@339.476,46.956
SER_EN: J13.20 J19.43 P28.2 U38.4@250.13,42.922 | length 222.8
  Top Layer w0.15: U38.4@250.13,42.922 250.328,42.922 250.36,42.889 v2(250.36,41.771) ; P28.2@250.295,37.076 U38.4@250.295,42.889 ; U38.4@250.36,42.922 U38.4@250.537,42.922
  Top Layer w0.2: J13.20@125.836,136.465 125.836,136.33 125.837,126.284 125.837,126.243 126.074,126.006 v3(126.074,125.925)
  Layer 1 w0.1: J19.43@248.364,60.323 247.376,61.31 247.376,66.221 v3(248.5,67.344)
  Layer 1 w0.15: v3@248.319,52.875 J19.43@248.319,60.043
  Layer 2 w0.15: v3@126.057,125.919 126.057,73.164 131.922,67.299 v3@248.501,67.299 ; v3(248.349,52.875) 248.349,43.782 v2(250.36,41.771) ; P28.2@250.188,36.969 P28.2@250.295,37.076
SER_EN_EXT: J18.D15 P28.1 U38.2@248.047,43.572 U50.37 | length 312.5
  Top Layer w0.15: P28.1@247.755,37.076 247.08,37.751 247.08,43.084 247.568,43.572 U38.2@248.047,43.572
  Layer 1 w0.15: U50.37@54.29,28.109 56.969,25.43 276.272,25.43 276.873,26.031 291.917,41.076 v3(338.196,41.076)
  Layer 2 w0.15: v3(247.787,25.43) 248.326,25.968 P28.1@248.326,37.167
  Bottom Layer w0.15: v3(338.196,41.076) 338.675,41.076 J18.D15@339.476,41.876
SER_IN: J13.16 J19.37 P27.2 U37.4@232.354,43.012 | length 221.6
  Top Layer w0.15: P27.2@232.22,37.269 232.22,42.91 232.323,43.012 U37.4@232.354,43.012
  Top Layer w0.2: J13.16@126.845,136.33 126.845,127.986 v3(127.304,127.527)
  Layer 1 w0.1: J19.37@243.284,60.323 242.082,61.525 242.082,67.406 v3(243.365,68.689)
  Layer 1 w0.15: v3(242.484,53.163) 243.361,54.04 J19.37@243.361,59.987
  Layer 2 w0.15: v3@127.363,127.685 127.363,127.527 127.363,73.366 132.128,68.601 243.277,68.601 v3(243.365,68.689) v3@243.365,68.703 ; P27.2@232.22,37.269 P27.2@232.253,37.236 ; v2(232.253,40.281) 232.253,44.194 239.035,50.976 240.297,50.976 v3(242.484,53.163)
SER_IN_EXT: J18.D12 P27.1 U37.2@230.271,43.662 U50.35 | length 307
  Top Layer w0.15: P27.1@229.68,37.269 229.122,37.827 229.122,43.141 229.638,43.657 229.638,43.66 230.269,43.66 U37.2@230.271,43.662
  Layer 1 w0.15: U50.35@59.37,28.109 60.992,26.487 231.738,26.487 231.758,26.507 275.281,26.507 275.551,26.777 293.438,44.664 337.101,44.664 v3(338.156,45.719)
  Layer 2 w0.15: v3@229.656,26.462 P27.1@229.656,37.269
  Bottom Layer w0.15: v3(338.156,45.719) 338.173,45.703 339.459,45.703 J18.D12@339.476,45.686
  other v3: 229.708,26.462
SER_OUT: J13.18 J19.40 P38.1 U48.2@239.118,43.601 | length 222.3
  Top Layer w0.15: P38.1@238.444,37.091 237.97,37.565 v2(237.97,43.597) 237.972,43.599 239.116,43.599 U48.2@239.118,43.601
  Top Layer w0.2: J13.18@126.36,136.44 126.36,127.052 126.642,126.771 v3(126.642,126.689)
  Layer 1 w0.1: v3(245.73,68.007) 244.849,67.126 244.849,61.298 J19.40@245.824,60.323
  Layer 1 w0.15: v3@244.755,52.935 245.907,54.086 J19.40@245.907,60.072
  Layer 2 w0.15: 126.704,73.208 131.98,67.931 245.792,67.931 v3@245.832,67.972 ; 126.704,73.248 v3@126.704,126.678 ; v2(237.97,43.597) 237.97,49.039 239.463,50.532 242.331,50.532 v3(244.691,52.892)
SER_OUT_EXT: J18.D14 P38.2 U48.4@241.201,42.951 U50.36 | length 307.7
  Top Layer w0.15: P38.2@240.984,37.091 240.984,42.849 241.087,42.951 U48.4@241.201,42.951
  Layer 1 w0.15: U50.36@56.83,28.109 59.001,25.937 240.907,25.937 240.977,26.007 275.914,26.007 276.641,26.733 293.109,43.201 v3(338.13,43.201)
  Layer 2 w0.15: P38.2@240.873,36.98 P38.2@240.984,37.091 ; v3@240.954,25.896 P38.2@240.954,36.703
  Bottom Layer w0.15: v3(338.13,43.201) 338.158,43.173 339.448,43.173 J18.D14@339.476,43.146
  other v3: 240.977,25.982
SPKGATE: J13.38 J18.D21 J19.49 U50.41 | length 516.6
  Top Layer w0.15: 121.32,132.773 J13.38@121.32,135.82
  Layer 1 w0.15: v3(121.932,90.619) 121.932,90.467 107.309,75.845 107.309,41.78 97.554,32.025 86.16,32.025 85.792,32.393 85.063,32.393 84.696,32.025 48.047,32.025 U50.41@44.13,28.109 50.651,21.588 250.263,21.588 250.279,21.572 276.532,21.572 289.184,34.224 v3(338.399,34.224) ; v3(253.286,52.722) J19.49@253.286,60.323
  Layer 2 w0.15: v3@121.323,132.671 121.323,91.109 121.813,90.619 v3(121.932,90.619) ; v3(250.279,21.588) 250.279,24.688 257.953,32.362 257.953,48.055 v3(253.286,52.722)
  Bottom Layer w0.15: v3(338.399,34.224) 338.415,34.24 339.459,34.24 J18.D21@339.476,34.256
  other v3: 121.285,132.514
STATE_OUT: J13.12 J19.31 P35.1 U45.2@212.378,43.582 | length 232.9
  Top Layer w0.15: P35.1@211.703,37.072 211.23,37.546 v2(211.23,43.579) 211.232,43.58 U45.2@212.378,43.582 U45.2@212.378,43.582
  Top Layer w0.2: J13.12@127.845,136.33 127.87,136.305 127.87,129.667 v3(128.451,129.086)
  Layer 1 w0.1: v3(237.799,69.785) 237.229,69.215 237.229,61.298 J19.31@238.204,60.323
  Layer 1 w0.15: v3(235.32,50.978) 236.099,50.978 238.532,53.411 J19.31@238.532,60.323
  Layer 2 w0.15: 128.739,129.12 128.739,73.544 132.498,69.785 v3(237.799,69.785) ; v2(211.23,43.579) 211.23,48.58 213.421,50.771 235.114,50.771 v3(235.32,50.978)
STATE_OUT_EXT: J18.D09 P35.2 U45.4@214.461,42.932 U50.33 | length 300.1
  Top Layer w0.15: P35.2@214.243,37.072 214.243,42.83 214.346,42.932 U45.4@214.461,42.932
  Layer 1 w0.15: U50.33@64.45,28.109 65.126,27.433 163.627,27.433 v3(214.12,27.629) 274.639,27.629 295.251,48.24 337.229,48.24 337.811,48.822 v3(338.198,48.822)
  Layer 2 w0.15: v3@214.133,27.433 214.133,36.961 P35.2@214.243,37.072
  Bottom Layer w0.15: v3(338.198,48.822) 338.655,49.279 339.587,49.279 J18.D09@339.604,49.262
VBIAS_2P5V: C66.1 C71.1 C74.1 C75.1 C79.1 C80.1 C86.1 C87.1 C129.1 P45.2 R47.1 R48.1 R50.1 U52.7 U54.7 U69.7 | length 155.6
  Top Layer w0.3: R47.1@289.965,114.422 289.965,118.928 C75.1@290,118.989 ; R48.1@290.066,97.794 C80.1@290.066,102.977 ; R50.1@313.596,97.637 C87.1@313.596,102.643
  Top Layer w0.4: C129.1@307.084,112.147 308.618,112.147 ; C66.1@307.233,149.052 307.233,149.101 308.668,149.101 ; C71.1@307.3,131.301 308.834,131.301 ; v3(308.618,110.103) 308.618,112.147 ; v3(308.668,147.274) 308.668,149.101 ; v3(308.834,129.256) 308.834,131.301 ; U69.7@310.879,112.147 308.618,112.147 ; U54.7@311.094,131.301 308.834,131.301 ; U52.7@311.244,149.101 308.668,149.101
  Top Layer w0.5: C75.1@290,118.989 290.282,119.272 290.341,119.213 v2(297.003,119.213) ; C80.1@290.101,103.038 290.231,103.168 290.383,103.32 290.39,103.314 v2(297.026,103.314) ; C87.1@313.631,102.704 313.761,102.835 313.913,102.987 313.92,102.98 v5(316.837,102.98) v5@316.903,102.98
  Bottom Layer w0.4: P45.2@301.195,143.01 305.458,147.274 v3(308.668,147.274) ; 302.335,110.04 v3@308.583,110.04 ; 303.675,131.71 306.058,129.328 306.129,129.256 v3(308.834,129.256)
  Bottom Layer w0.8: v2@297,103.314 297,124.822 302.091,129.912 ; P45.2@301.195,143.01 303.675,140.529 303.675,131.71 303.675,131.497 302.091,129.912 ; v5@316.903,102.98 v5(316.837,102.98) 311.452,102.98 310.458,103.974 303.085,103.974 302.091,104.968 302.091,129.912
VBIAS_ADAPT: U54.2 U60.3 | length 56.3
  Top Layer w0.2: U60.3@302.573,93.195 302.805,93.195 302.911,93.09 304.564,91.436 v3(305.941,91.436) ; U54.2@311.094,134.551 311.128,134.584 312.214,134.584 v2(312.966,135.336)
  Layer 1 w0.2: v3(305.941,91.436) 303.44,93.937 303.44,116.842 314.291,127.693 314.291,131.589 312.966,132.914 v2(312.966,135.336)
VBIAS_AFE: U54.8 U57.3 | length 72.6
  Top Layer w0.2: U57.3@279.043,93.528 279.275,93.528 280.836,91.968 v3(298.49,91.968) ; U54.8@311.094,130.651 311.206,130.762 312.214,130.762 312.8,131.348 v2(312.8,132.055)
  Layer 1 w0.2: v3(298.49,91.968) 298.49,117.546 300.521,119.576 305.586,119.576 313.773,127.763 313.773,130.444 312.8,131.418 v2(312.8,132.055)
VBIAS_SLEW: U54.9 U55.3 | length 52.9
  Top Layer w0.2: U55.3@278.942,109.48 279.174,109.48 280.735,107.92 v3(297.886,107.92) ; U54.9@311.094,130.001 311.21,130.116 312.711,130.116 v2(312.835,130.24)
  Layer 1 w0.2: v3@297.905,107.92 297.905,117.79 300.384,120.27 305.487,120.27 312.835,127.617 v2(312.835,130.24)